# Altium PCB Axis_Channel_Blade.PcbDoc (part 2 of 2)
Units mm, origin at the board's own origin, x right, y up, seen from the top; angles counter-clockwise.
Board outline 100 x 100 mm, 4 copper layers (Top Layer 1, L2_GND, L3_PWR, Bottom Layer 1), stack 1.556 mm thick; 170 components, 613 nets, 644 pads, 0 vias.
Unrouted connection lines stored in the file: 341.
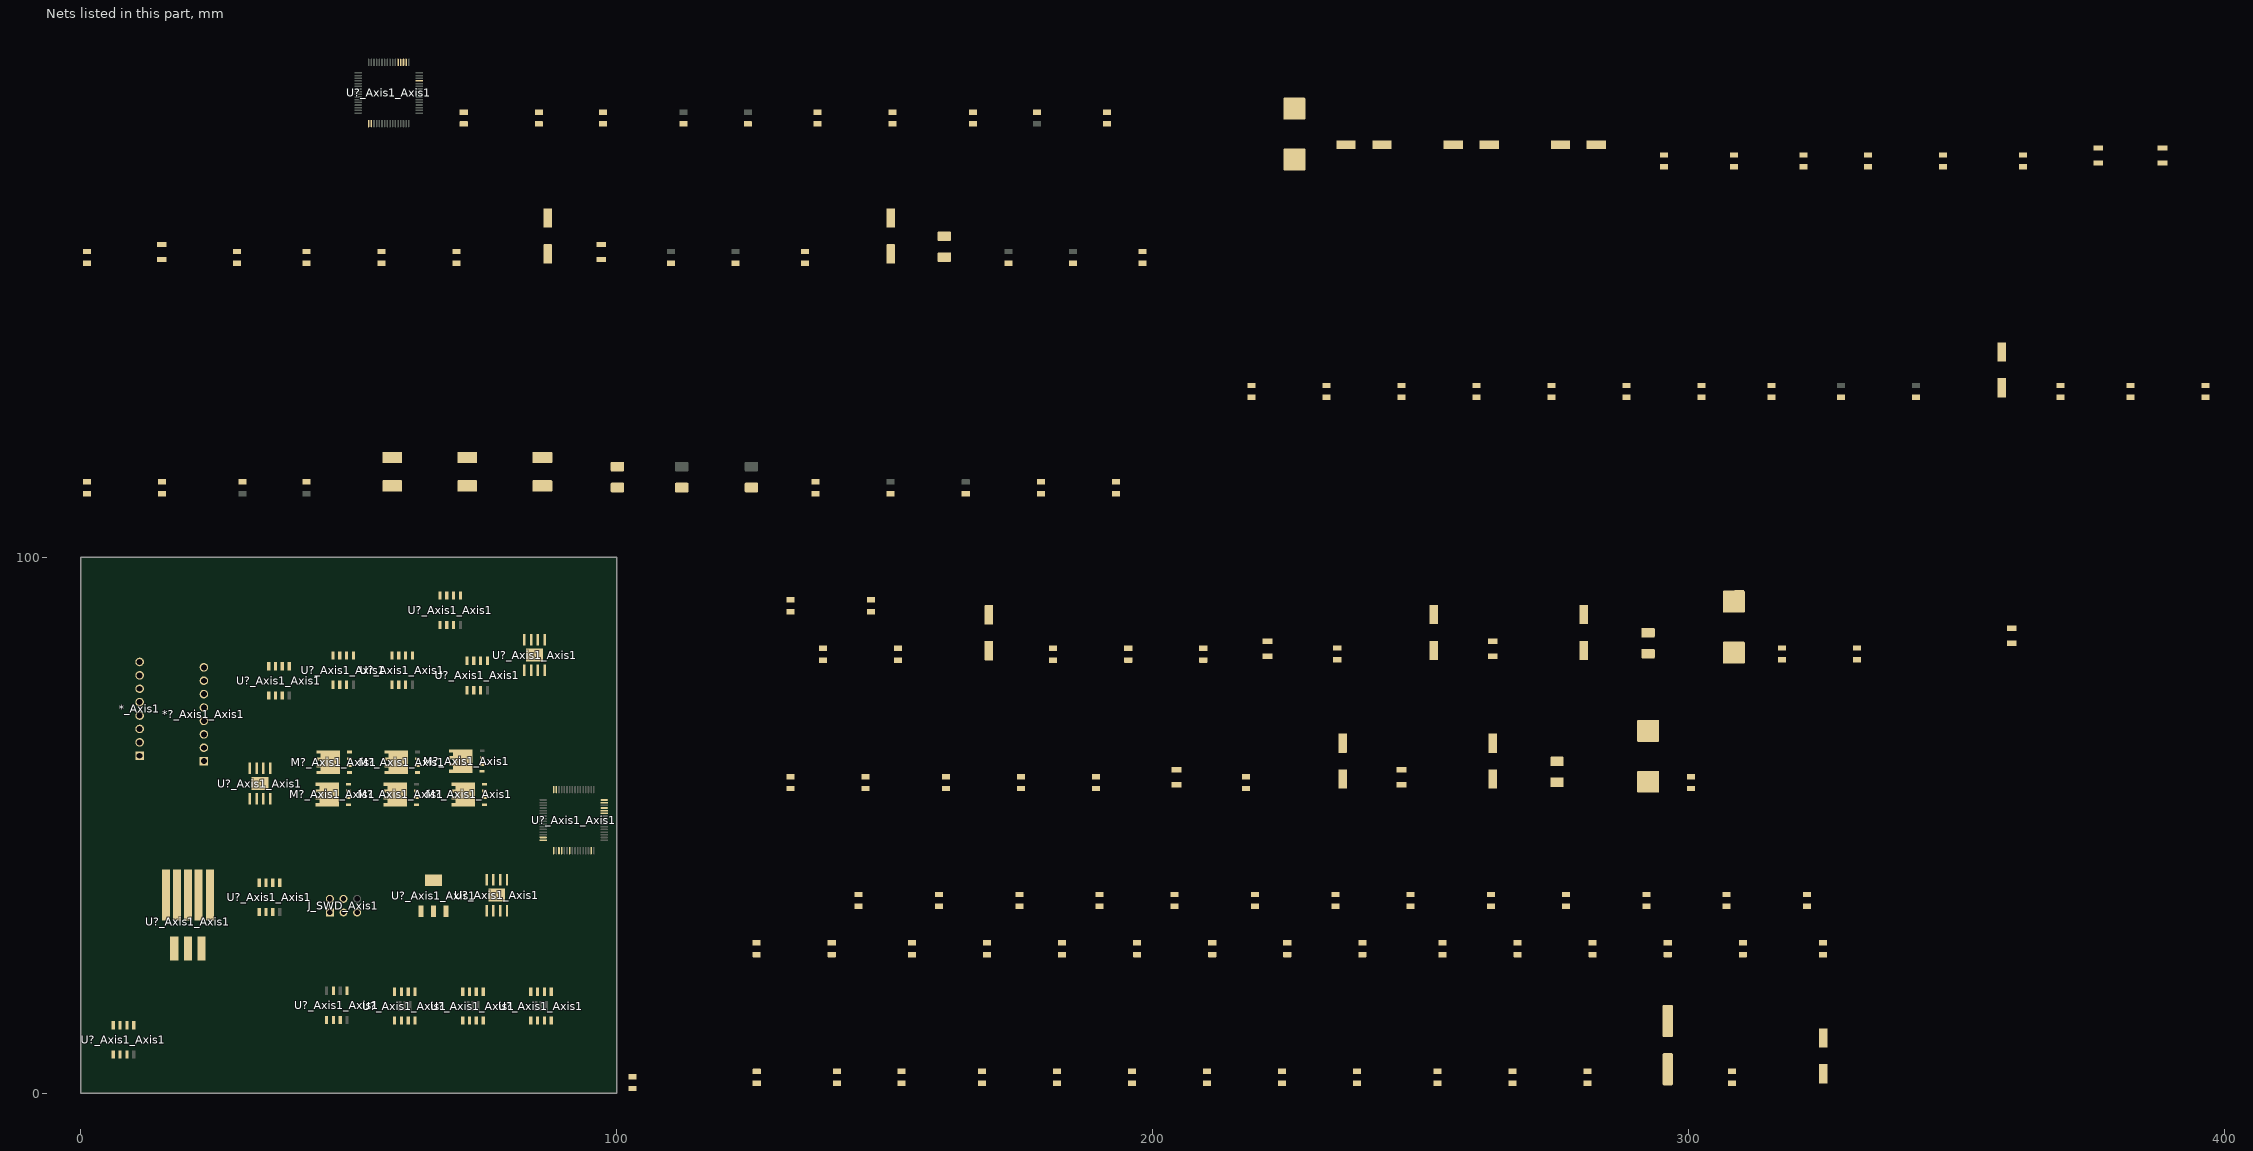
[diagram p4: the nets of this part, all layers, seen from the top]

## Part data
C1_Axis1 C2_Axis1 C3_Axis1 C9_Axis1 C14_Axis1 C33_Axis1 C35_Axis1 C49_Axis1 C49_Axis2 C51_Axis1: "2.2u-10u"
C4_Axis1 C5_Axis1 C6_Axis1 C10_Axis1 C11_Axis1 C12_Axis1 C13_Axis1 C15_Axis1 C16_Axis1 C17_Axis1 C19_Axis1 C20_Axis1 C23_Axis1 C25_Axis1 C26_Axis1 C28_Axis1 C29_Axis1 C34_Axis1 C36_Axis1 C37_Axis1 C39_Axis1 C41_Axis1 C45_Axis1 C46_Axis1 C50_Axis1 C52_Axis1 C53_Axis1 C55_Axis1 C55_Axis2 C56_Axis1 C56_Axis2 C57_Axis1 C57_Axis2 C58_Axis1 C58_Axis2 C59_Axis1 C59_Axis2 C60_Axis1 C60_Axis2 C61_Axis1 C61_Axis2 C?_Axis1: "0.1u-1u"
C7_Axis1 C8_Axis1 C18_Axis1 C31_Axis1 C32_Axis1 C38_Axis1 C47_Axis1 C48_Axis1 C54_Axis1 C_BULK1_Axis1 C_BULK2_Axis1 C_BULK3_Axis1: library part "ECAP SMD", "50V 220u ECAP"
C40_Axis1 C42_Axis1 C43_Axis1 C44_Axis1 C?_Axis1 C?_Axis1 C?_Axis1 C?_Axis1: library part "Capacitor 0805"
  C40_Axis1 C?_Axis1: Parameter 1=100n
  C43_Axis1 C?_Axis1: Parameter 1=10p
  C44_Axis1 C?_Axis1 C?_Axis1: Parameter 1=30p
D?_Axis1 D?_Axis1 D?_Axis1: library part "Suppressor Dual", "Suppressor Dual"
FB1_Axis1 FB2_Axis1 FB3_Axis1 FB4_Axis1 FB5_Axis1 FB?_Axis1: "600 ohm 100Mhz"
M?_Axis1_Axis1 M?_Axis1_Axis1 M?_Axis1_Axis1 M?_Axis1_Axis1 M?_Axis1_Axis1 M?_Axis1_Axis1: library part BSC030N08NS5
R?_Axis1 R?_Axis1 R?_Axis1 R?_Axis1: library part "Resistor 0805"
U?_Axis1_Axis1 U?_Axis1_Axis1: "STM32 with ADC"
U?_Axis1_Axis1 U?_Axis1_Axis1 U?_Axis1_Axis1 U?_Axis1_Axis1 U?_Axis1_Axis1 U?_Axis1_Axis1: "20 Mbps RS-422/485"
U?_Axis1_Axis1: "Output Current up to 1A"
U?_Axis1_Axis1 U?_Axis1_Axis1 U?_Axis1_Axis1: "Step down DC/DC"
U?_Axis1_Axis1 U?_Axis1_Axis1 U?_Axis1_Axis1: "3A, 20V Half-Bridge Gate Driver"
U?_Axis1_Axis1 U?_Axis1_Axis1: "Amplifier. A1=20 V/V and +-6.75 Mohm for shunt"
U?_Axis1_Axis1: "LDO 3.3V"
Y?_Axis1: library part Crystal

## Nets (pads, with @x,y where several pads share a name; then routed paths per layer and width w, separated by ;. In a path a pad name is that pad's centre, name@x,y a point inside that pad or via, vN(x,y) a via of type N, cw(c..) or ccw(c..) an arc to the next point about the centre after c; other vN are vias at no path point)
+3.3: C23_Axis1.2 C25_Axis1.2 C28_Axis1.2 C37_Axis1.2 FB4_Axis1.2 FB5_Axis1.2 FB?_Axis1.1 J_SWD_Axis1.1 R28_Axis1.2 U?_Axis1_Axis1.1@88.25,45.3 U?_Axis1_Axis1.2@65.839,33.959 U?_Axis1_Axis1.3@35.857,33.855 U?_Axis1_Axis1.3@48.433,13.683 U?_Axis1_Axis1.4@65.839,39.759 U?_Axis1_Axis1.32@97.7,54.75 U?_Axis1_Axis1.48@88.25,56.7 U?_Axis1_Axis1.64@86.3,47.25
+5: *?_Axis1_Axis1.2 C53_Axis1.2 U?_Axis1_Axis1.3@22.54,27 U?_Axis1_Axis1.8@6.075,12.725 U?_Axis1_Axis1.8@35.075,79.725 U?_Axis1_Axis1.8@47.075,81.725 U?_Axis1_Axis1.8@58.075,81.725 U?_Axis1_Axis1.8@67.041,92.89 U?_Axis1_Axis1.8@72.075,80.725
+12: FB1_Axis1.2 FB2_Axis1.2 FB3_Axis1.2
A1_Axis1: C56_Axis1.2 R42_Axis1.2
A1_Axis1_N: *_Axis1.4 U?_Axis1_Axis1.7@36.35,79.725
A1_Axis1_P: U?_Axis1_Axis1.6@37.625,79.725
A1_Axis2: C56_Axis2.2 R42_Axis2.2
A1_Axis2_N: 
A1_Axis2_P: 
A1_Axis3: 
A1_Axis3_N: 
A1_Axis3_P: 
A1_Axis4: 
A1_Axis4_N: 
A1_Axis4_P: 
A1_Axis5: 
A1_Axis5_N: 
A1_Axis5_P: 
A1_Axis6: 
A1_Axis6_N: 
A1_Axis6_P: 
A2_Axis1: C59_Axis1.2 R45_Axis1.2
A2_Axis1_N: *?_Axis1_Axis1.4 U?_Axis1_Axis1.7@73.35,80.725
A2_Axis1_P: *?_Axis1_Axis1.3 U?_Axis1_Axis1.6@74.625,80.725
A2_Axis2: C59_Axis2.2 R45_Axis2.2
A2_Axis2_N: 
A2_Axis2_P: 
A2_Axis3: 
A2_Axis3_N: 
A2_Axis3_P: 
A2_Axis4: 
A2_Axis4_N: 
A2_Axis4_P: 
A2_Axis5: 
A2_Axis5_N: 
A2_Axis5_P: 
A2_Axis6: 
A2_Axis6_N: 
A2_Axis6_P: 
AGND: C20_Axis1.2 C26_Axis1.2 C29_Axis1.2 C40_Axis1.2 C42_Axis1.2 C44_Axis1.1 C?_Axis1.1@166.481,180.9 C?_Axis1.1@300.481,56.9 C?_Axis1.2@30.156,114.1 C?_Axis1.2@178.481,183.1 U?_Axis1_Axis1.2@34.582,33.855 U?_Axis1_Axis1.2@47.158,13.683 U?_Axis1_Axis1.7@34.582,39.33 U?_Axis1_Axis1.7@47.158,19.158 U?_Axis1_Axis1.27@97.7,52.25
"AMP1 IN+_Axis1": M?_Axis1_Axis1.1@50.171,59.877 M?_Axis1_Axis1.2@50.173,61.147 M?_Axis1_Axis1.3@50.173,62.417 R12_Axis1.1 R19_Axis1.1 R22_Axis1.2 R?_Axis1.1@124.481,180.9
"AMP1 IN+_Axis2": 
"AMP1 IN+_Axis3": 
"AMP1 IN+_Axis4": 
"AMP1 IN+_Axis5": 
"AMP1 IN+_Axis6": 
"AMP1 IN-_Axis1": 
"AMP1 IN-_Axis1": C1_Axis1.2 C2_Axis1.2 C3_Axis1.2 C4_Axis1.2 C5_Axis1.2 C6_Axis1.2 C8_Axis1.1 C9_Axis1.1 C10_Axis1.1 C14_Axis1.1 C18_Axis1.2 C19_Axis1.2 C32_Axis1.1 C33_Axis1.1 C34_Axis1.1 C35_Axis1.1 C36_Axis1.1 C37_Axis1.1 C38_Axis1.2 C39_Axis1.2 C48_Axis1.1 C49_Axis1.1 C49_Axis2.1 C50_Axis1.1 C51_Axis1.1 C52_Axis1.1 C53_Axis1.1 C54_Axis1.2 C55_Axis1.2 C55_Axis2.2 C_BULK1_Axis1.2 C_BULK2_Axis1.2 C_BULK3_Axis1.2 D1_Axis1.1 D5_Axis1.1 D6_Axis1.1 D?_Axis1.1 R15_Axis1.1 R16_Axis1.1 R18_Axis1.1 R22_Axis1.1 R23_Axis1.1 R24_Axis1.1 R30_Axis1.1 R31_Axis1.1 R33_Axis1.1 R38_Axis1.1 R39_Axis1.1 R41_Axis1.1 R41_Axis2.1 R?_Axis1.1@85.481,180.9 R?_Axis1.1@331.475,80.9 U?_Axis1_Axis1.1@63.539,33.959 U?_Axis1_Axis1.2@20,27 U?_Axis1_Axis1.4@15.9,37 U?_Axis1_Axis1.4@18,37 U?_Axis1_Axis1.4@20,37 U?_Axis1_Axis1.4@22,37 U?_Axis1_Axis1.4@24.1,37 U?_Axis1_Axis1.7@32.819,60.689 U?_Axis1_Axis1.7@59.858,18.981 U?_Axis1_Axis1.7@72.558,18.981 U?_Axis1_Axis1.7@77.015,39.861 U?_Axis1_Axis1.7@84.049,84.673 U?_Axis1_Axis1.7@85.258,18.981 U?_Axis1_Axis1.9@33.454,57.814 U?_Axis1_Axis1.9@77.65,36.986 U?_Axis1_Axis1.9@84.684,81.798
"AMP1 IN-_Axis2": 
"AMP1 IN-_Axis3": 
"AMP1 IN-_Axis4": 
"AMP1 IN-_Axis5": 
"AMP1 IN-_Axis6": 
"AMP2 IN+_Axis1": M?_Axis1_Axis1.1@74.928,60.095 M?_Axis1_Axis1.2@74.93,61.365 M?_Axis1_Axis1.3@74.93,62.635 R14_Axis1.1 R21_Axis1.1 R24_Axis1.2 R?_Axis1.1@141.156,1.9
"AMP2 IN+_Axis2": 
"AMP2 IN+_Axis3": 
"AMP2 IN+_Axis4": 
"AMP2 IN+_Axis5": 
"AMP2 IN+_Axis6": 
B1_Axis1: C57_Axis1.2 R43_Axis1.2
B1_Axis1_N: *_Axis1.6 U?_Axis1_Axis1.7@48.35,81.725
B1_Axis1_P: *_Axis1.5 U?_Axis1_Axis1.6@49.625,81.725
B1_Axis2: C57_Axis2.2 R43_Axis2.2
B1_Axis2_N: 
B1_Axis2_P: 
B1_Axis3: 
B1_Axis3_N: 
B1_Axis3_P: 
B1_Axis4: 
B1_Axis4_N: 
B1_Axis4_P: 
B1_Axis5: 
B1_Axis5_N: 
B1_Axis5_P: 
B1_Axis6: 
B1_Axis6_N: 
B1_Axis6_P: 
B2_Axis1: C60_Axis1.2 R46_Axis1.2
B2_Axis1_N: *?_Axis1_Axis1.6 U?_Axis1_Axis1.7@68.316,92.89
B2_Axis1_P: *?_Axis1_Axis1.5 U?_Axis1_Axis1.6@69.591,92.89
B2_Axis2: C60_Axis2.2 R46_Axis2.2
B2_Axis2_N: 
B2_Axis2_P: 
B2_Axis3: 
B2_Axis3_N: 
B2_Axis3_P: 
B2_Axis4: 
B2_Axis4_N: 
B2_Axis4_P: 
B2_Axis5: 
B2_Axis5_N: 
B2_Axis5_P: 
B2_Axis6: 
B2_Axis6_N: 
B2_Axis6_P: 
CS_Axis1: U?_Axis1_Axis1.18@60.73,192.375
CS_Axis2: 
CS_Axis3: 
CS_Axis4: 
CS_Axis5: 
CS_Axis6: 
DGND: *?_Axis1_Axis1.1 C23_Axis1.1 C25_Axis1.1 C28_Axis1.1 C41_Axis1.1 C45_Axis1.1 C46_Axis1.1 C56_Axis1.1 C56_Axis2.1 C57_Axis1.1 C57_Axis2.1 C58_Axis1.1 C58_Axis2.1 C59_Axis1.1 C59_Axis2.1 C60_Axis1.1 C60_Axis2.1 C61_Axis1.1 C61_Axis2.1 J_SWD_Axis1.3 U?_Axis1_Axis1.2@7.35,7.25 U?_Axis1_Axis1.2@36.35,74.25 U?_Axis1_Axis1.2@48.35,76.25 U?_Axis1_Axis1.2@59.35,76.25 U?_Axis1_Axis1.2@68.316,87.415 U?_Axis1_Axis1.2@73.35,75.25 U?_Axis1_Axis1.3@8.625,7.25 U?_Axis1_Axis1.3@37.625,74.25 U?_Axis1_Axis1.3@49.625,76.25 U?_Axis1_Axis1.3@60.625,76.25 U?_Axis1_Axis1.3@69.591,87.415 U?_Axis1_Axis1.3@74.625,75.25 U?_Axis1_Axis1.5@9.9,12.725 U?_Axis1_Axis1.5@38.9,79.725 U?_Axis1_Axis1.5@50.9,81.725 U?_Axis1_Axis1.5@61.9,81.725 U?_Axis1_Axis1.5@70.866,92.89 U?_Axis1_Axis1.5@75.9,80.725 U?_Axis1_Axis1.15@95.25,45.3 U?_Axis1_Axis1.31@97.7,54.25 U?_Axis1_Axis1.47@88.75,56.7 U?_Axis1_Axis1.63@86.3,47.75
GND: 
"MAIN VCC": C8_Axis1.2 C9_Axis1.2 C32_Axis1.2 C33_Axis1.2 C48_Axis1.2 C49_Axis1.2 C49_Axis2.2 C_BULK1_Axis1.1 C_BULK2_Axis1.1 C_BULK3_Axis1.1 M?_Axis1_Axis1.5@44.183,53.877 M?_Axis1_Axis1.5@46.348,55.782 M?_Axis1_Axis1.5@56.883,53.877 M?_Axis1_Axis1.5@59.048,55.782 M?_Axis1_Axis1.5@69.583,53.877 M?_Axis1_Axis1.5@71.748,55.782 M?_Axis1_Axis1.6@44.183,55.147 M?_Axis1_Axis1.6@56.883,55.147 M?_Axis1_Axis1.6@69.583,55.147 M?_Axis1_Axis1.7@44.183,56.417 M?_Axis1_Axis1.7@56.883,56.417 M?_Axis1_Axis1.7@69.583,56.417 M?_Axis1_Axis1.8@44.183,57.687 M?_Axis1_Axis1.8@56.883,57.687 M?_Axis1_Axis1.8@69.583,57.687 R7_Axis1.2 R27_Axis1.2 R36_Axis1.2 U?_Axis1_Axis1.2@32.819,54.939 U?_Axis1_Axis1.2@77.015,34.111 U?_Axis1_Axis1.2@84.049,78.923
MISO_Axis1: U?_Axis1_Axis1.20@59.73,192.375
MISO_Axis2: 
MISO_Axis3: 
MISO_Axis4: 
MISO_Axis5: 
MISO_Axis6: 
MOSI_Axis1: U?_Axis1_Axis1.21@59.23,192.375
MOSI_Axis2: 
MOSI_Axis3: 
MOSI_Axis4: 
MOSI_Axis5: 
MOSI_Axis6: 
NetC1_Axis1_1: C1_Axis1.1 C4_Axis1.1 FB1_Axis1.1 U?_Axis1_Axis1.1@58.583,13.606
NetC1_Axis2_1: 
NetC1_Axis3_1: 
NetC1_Axis4_1: 
NetC1_Axis5_1: 
NetC1_Axis6_1: 
NetC2_Axis1_1: C2_Axis1.1 C5_Axis1.1 FB2_Axis1.1 U?_Axis1_Axis1.1@71.283,13.606
NetC2_Axis2_1: 
NetC2_Axis3_1: 
NetC2_Axis4_1: 
NetC2_Axis5_1: 
NetC2_Axis6_1: 
NetC3_Axis1_1: C3_Axis1.1 C6_Axis1.1 FB3_Axis1.1 U?_Axis1_Axis1.1@83.983,13.606
NetC3_Axis2_1: 
NetC3_Axis3_1: 
NetC3_Axis4_1: 
NetC3_Axis5_1: 
NetC3_Axis6_1: 
NetC7_Axis1_1: C7_Axis1.1 L?_Axis1.1@226.475,174.25 U?_Axis1_Axis1.8@31.549,60.689
NetC7_Axis1_2: C7_Axis1.2 U?_Axis1_Axis1.1@31.549,54.939
NetC7_Axis2_1: 
NetC7_Axis2_2: 
NetC7_Axis3_1: 
NetC7_Axis3_2: 
NetC7_Axis4_1: 
NetC7_Axis4_2: 
NetC7_Axis5_1: 
NetC7_Axis5_2: 
NetC7_Axis6_1: 
NetC7_Axis6_2: 
NetC10_Axis1_2: C10_Axis1.2 C14_Axis1.2 D1_Axis1.2 L?_Axis1.2@226.475,183.75 R8_Axis1.1
NetC10_Axis2_2: 
NetC10_Axis3_2: 
NetC10_Axis4_2: 
NetC10_Axis5_2: 
NetC10_Axis6_2: 
NetC11_Axis1_2: C11_Axis1.2 U?_Axis1_Axis1.2@59.858,13.606
NetC11_Axis2_2: 
NetC11_Axis3_2: 
NetC11_Axis4_2: 
NetC11_Axis5_2: 
NetC11_Axis6_2: 
NetC12_Axis1_2: C12_Axis1.2 U?_Axis1_Axis1.2@72.558,13.606
NetC12_Axis2_2: 
NetC12_Axis3_2: 
NetC12_Axis4_2: 
NetC12_Axis5_2: 
NetC12_Axis6_2: 
NetC13_Axis1_2: C13_Axis1.2 U?_Axis1_Axis1.2@85.258,13.606
NetC13_Axis2_2: 
NetC13_Axis3_2: 
NetC13_Axis4_2: 
NetC13_Axis5_2: 
NetC13_Axis6_2: 
NetC15_Axis1_2: C15_Axis1.2 R12_Axis1.2
NetC15_Axis2_2: 
NetC15_Axis3_2: 
NetC15_Axis4_2: 
NetC15_Axis5_2: 
NetC15_Axis6_2: 
NetC16_Axis1_2: C16_Axis1.2 R13_Axis1.2
NetC16_Axis2_2: 
NetC16_Axis3_2: 
NetC16_Axis4_2: 
NetC16_Axis5_2: 
NetC16_Axis6_2: 
NetC17_Axis1_2: C17_Axis1.2 R14_Axis1.2
NetC17_Axis2_2: 
NetC17_Axis3_2: 
NetC17_Axis4_2: 
NetC17_Axis5_2: 
NetC17_Axis6_2: 
NetC18_Axis1_1: C18_Axis1.1 R17_Axis1.1 U?_Axis1_Axis1.5@35.359,60.689
NetC18_Axis2_1: 
NetC18_Axis3_1: 
NetC18_Axis4_1: 
NetC18_Axis5_1: 
NetC18_Axis6_1: 
NetC19_Axis1_1: C19_Axis1.1 R17_Axis1.2
NetC19_Axis2_1: 
NetC19_Axis3_1: 
NetC19_Axis4_1: 
NetC19_Axis5_1: 
NetC19_Axis6_1: 
NetC20_Axis1_1: C20_Axis1.1 C26_Axis1.1 C29_Axis1.1 C?_Axis1.2@166.481,183.1 FB?_Axis1.2 U?_Axis1_Axis1.28@97.7,52.75 U?_Axis1_Axis1.29@97.7,53.25
NetC20_Axis2_1: 
NetC20_Axis3_1: 
NetC20_Axis4_1: 
NetC20_Axis5_1: 
NetC20_Axis6_1: 
NetC31_Axis1_1: C31_Axis1.1 L?_Axis1.1@292.48,58.152 U?_Axis1_Axis1.8@75.745,39.861
NetC31_Axis1_2: C31_Axis1.2 U?_Axis1_Axis1.1@75.745,34.111
NetC31_Axis2_1: 
NetC31_Axis2_2: 
NetC31_Axis3_1: 
NetC31_Axis3_2: 
NetC31_Axis4_1: 
NetC31_Axis4_2: 
NetC31_Axis5_1: 
NetC31_Axis5_2: 
NetC31_Axis6_1: 
NetC31_Axis6_2: 
NetC34_Axis1_2: C34_Axis1.2 C35_Axis1.2 C36_Axis1.2 D5_Axis1.2 L?_Axis1.2@292.48,67.652 R29_Axis1.1 U?_Axis1_Axis1.3@68.139,33.959
NetC34_Axis2_2: 
NetC34_Axis3_2: 
NetC34_Axis4_2: 
NetC34_Axis5_2: 
NetC34_Axis6_2: 
NetC38_Axis1_1: C38_Axis1.1 R32_Axis1.1 U?_Axis1_Axis1.5@79.555,39.861
NetC38_Axis2_1: 
NetC38_Axis3_1: 
NetC38_Axis4_1: 
NetC38_Axis5_1: 
NetC38_Axis6_1: 
NetC39_Axis1_1: C39_Axis1.1 R32_Axis1.2
NetC39_Axis2_1: 
NetC39_Axis3_1: 
NetC39_Axis4_1: 
NetC39_Axis5_1: 
NetC39_Axis6_1: 
NetC40_Axis1_1: C40_Axis1.1 FB5_Axis1.1 U?_Axis1_Axis1.6@35.857,39.33
NetC40_Axis2_1: 
NetC40_Axis3_1: 
NetC40_Axis4_1: 
NetC40_Axis5_1: 
NetC40_Axis6_1: 
NetC41_Axis1_2: C41_Axis1.2 J_SWD_Axis1.5 R28_Axis1.1 U?_Axis1_Axis1.7@91.25,45.3
NetC41_Axis2_2: 
NetC41_Axis3_2: 
NetC41_Axis4_2: 
NetC41_Axis5_2: 
NetC41_Axis6_2: 
NetC42_Axis1_1: C42_Axis1.1 C43_Axis1.2 R?_Axis1.2@141.156,4.1 U?_Axis1_Axis1.8@33.307,39.33
NetC42_Axis2_1: 
NetC42_Axis3_1: 
NetC42_Axis4_1: 
NetC42_Axis5_1: 
NetC42_Axis6_1: 
NetC43_Axis1_1: C43_Axis1.1 C44_Axis1.2 R?_Axis1.2@331.475,83.1 U?_Axis1_Axis1.1@33.307,33.855
NetC43_Axis2_1: 
NetC43_Axis3_1: 
NetC43_Axis4_1: 
NetC43_Axis5_1: 
NetC43_Axis6_1: 
NetC45_Axis1_2: C45_Axis1.2 U?_Axis1_Axis1.4@89.75,45.3 Y?_Axis1.1
NetC45_Axis2_2: 
NetC45_Axis3_2: 
NetC45_Axis4_2: 
NetC45_Axis5_2: 
NetC45_Axis6_2: 
NetC46_Axis1_2: C46_Axis1.2 U?_Axis1_Axis1.3@89.25,45.3 Y?_Axis1.2
NetC46_Axis2_2: 
NetC46_Axis3_2: 
NetC46_Axis4_2: 
NetC46_Axis5_2: 
NetC46_Axis6_2: 
NetC47_Axis1_1: C47_Axis1.1 L?_Axis1.1@308.475,82.25 U?_Axis1_Axis1.8@82.779,84.673
NetC47_Axis1_2: C47_Axis1.2 U?_Axis1_Axis1.1@82.779,78.923
NetC47_Axis2_1: 
NetC47_Axis2_2: 
NetC47_Axis3_1: 
NetC47_Axis3_2: 
NetC47_Axis4_1: 
NetC47_Axis4_2: 
NetC47_Axis5_1: 
NetC47_Axis5_2: 
NetC47_Axis6_1: 
NetC47_Axis6_2: 
NetC50_Axis1_2: C50_Axis1.2 C51_Axis1.2 C52_Axis1.2 D6_Axis1.2 L?_Axis1.2@308.475,91.75 R37_Axis1.1 U?_Axis1_Axis1.1@17.46,27
NetC50_Axis2_2: 
NetC50_Axis3_2: 
NetC50_Axis4_2: 
NetC50_Axis5_2: 
NetC50_Axis6_2: 
NetC54_Axis1_1: C54_Axis1.1 R40_Axis1.1 U?_Axis1_Axis1.5@86.589,84.673
NetC54_Axis2_1: R40_Axis2.1
NetC54_Axis3_1: 
NetC54_Axis4_1: 
NetC54_Axis5_1: 
NetC54_Axis6_1: 
NetC55_Axis1_1: C55_Axis1.1 R40_Axis1.2
NetC55_Axis2_1: C55_Axis2.1 R40_Axis2.2
NetC55_Axis3_1: 
NetC55_Axis4_1: 
NetC55_Axis5_1: 
NetC55_Axis6_1: 
NetC?_Axis1_1: C?_Axis1.1@112.481,180.9 C?_Axis1.2@300.481,59.1 R?_Axis1.2@85.481,183.1 U?_Axis1_Axis1.1@45.883,13.683
NetC?_Axis1_2: 
NetC?_Axis2_1: 
NetC?_Axis2_2: 
NetC?_Axis3_1: 
NetC?_Axis3_2: 
NetC?_Axis4_1: 
NetC?_Axis4_2: 
NetC?_Axis5_1: 
NetC?_Axis5_2: 
NetC?_Axis6_1: 
NetC?_Axis6_2: 
NetD?_Axis1_1: 
NetD?_Axis1_2: D?_Axis1.2@100.156,116.95 M?_Axis1_Axis1.4@50.173,63.687 R9_Axis1.2 R19_Axis1.2
NetD?_Axis2_1: 
NetD?_Axis2_2: 
NetD?_Axis3_1: 
NetD?_Axis3_2: 
NetD?_Axis4_1: 
NetD?_Axis4_2: 
NetD?_Axis5_1: 
NetD?_Axis5_2: 
NetD?_Axis6_1: 
NetD?_Axis6_2: 
NetM?_Axis1_4: M?_Axis1_Axis1.4@49.973,57.687
NetM?_Axis1_Axis1_1: M?_Axis1_Axis1.1@62.871,59.877 M?_Axis1_Axis1.2@62.873,61.147 M?_Axis1_Axis1.3@62.873,62.417 R13_Axis1.1 R20_Axis1.1 R23_Axis1.2
NetM?_Axis1_Axis1_4: M?_Axis1_Axis1.4@75.373,57.687 R3_Axis1.2 R6_Axis1.2
NetM?_Axis1_Axis2_1: 
NetM?_Axis1_Axis2_4: 
NetM?_Axis1_Axis3_1: 
NetM?_Axis1_Axis3_4: 
NetM?_Axis1_Axis4_1: 
NetM?_Axis1_Axis4_4: 
NetM?_Axis1_Axis5_1: 
NetM?_Axis1_Axis5_4: 
NetM?_Axis1_Axis6_1: 
NetM?_Axis1_Axis6_4: 
NetM?_Axis2_1: 
NetM?_Axis2_4: 
NetM?_Axis3_1: 
NetM?_Axis3_4: 
NetM?_Axis4_1: 
NetM?_Axis4_4: 
NetM?_Axis5_1: 
NetM?_Axis5_4: 
NetM?_Axis6_1: 
NetM?_Axis6_4: 
NetR1_Axis1_1: R1_Axis1.1 U?_Axis1_Axis1.3@61.133,13.606
NetR1_Axis2_1: 
NetR1_Axis3_1: 
NetR1_Axis4_1: 
NetR1_Axis5_1: 
NetR1_Axis6_1: 
NetR2_Axis1_1: R2_Axis1.1 U?_Axis1_Axis1.3@73.833,13.606
NetR2_Axis2_1: 
NetR2_Axis3_1: 
NetR2_Axis4_1: 
NetR2_Axis5_1: 
NetR2_Axis6_1: 
NetR3_Axis1_1: R3_Axis1.1 U?_Axis1_Axis1.3@86.533,13.606
NetR3_Axis2_1: 
NetR3_Axis3_1: 
NetR3_Axis4_1: 
NetR3_Axis5_1: 
NetR3_Axis6_1: 
NetR7_Axis1_1: R7_Axis1.1 R15_Axis1.2 U?_Axis1_Axis1.3@34.089,54.939
NetR7_Axis2_1: 
NetR7_Axis3_1: 
NetR7_Axis4_1: 
NetR7_Axis5_1: 
NetR7_Axis6_1: 
NetR8_Axis1_2: R8_Axis1.2 R18_Axis1.2 U?_Axis1_Axis1.6@34.089,60.689
NetR8_Axis2_2: 
NetR8_Axis3_2: 
NetR8_Axis4_2: 
NetR8_Axis5_2: 
NetR8_Axis6_2: 
NetR9_Axis1_1: R9_Axis1.1 U?_Axis1_Axis1.8@58.583,18.981
NetR9_Axis2_1: 
NetR9_Axis3_1: 
NetR9_Axis4_1: 
NetR9_Axis5_1: 
NetR9_Axis6_1: 
NetR10_Axis1_1: R10_Axis1.1 U?_Axis1_Axis1.8@71.283,18.981
NetR10_Axis2_1: 
NetR10_Axis3_1: 
NetR10_Axis4_1: 
NetR10_Axis5_1: 
NetR10_Axis6_1: 
NetR11_Axis1_1: R11_Axis1.1 U?_Axis1_Axis1.8@83.983,18.981
NetR11_Axis2_1: 
NetR11_Axis3_1: 
NetR11_Axis4_1: 
NetR11_Axis5_1: 
NetR11_Axis6_1: 
NetR16_Axis1_2: R16_Axis1.2 U?_Axis1_Axis1.4@35.359,54.939
NetR16_Axis2_2: 
NetR16_Axis3_2: 
NetR16_Axis4_2: 
NetR16_Axis5_2: 
NetR16_Axis6_2: 
NetR27_Axis1_1: R27_Axis1.1 R30_Axis1.2 U?_Axis1_Axis1.3@78.285,34.111
NetR27_Axis2_1: 
NetR27_Axis3_1: 
NetR27_Axis4_1: 
NetR27_Axis5_1: 
NetR27_Axis6_1: 
NetR29_Axis1_2: R29_Axis1.2 R33_Axis1.2 U?_Axis1_Axis1.6@78.285,39.861
NetR29_Axis2_2: 
NetR29_Axis3_2: 
NetR29_Axis4_2: 
NetR29_Axis5_2: 
NetR29_Axis6_2: 
NetR31_Axis1_2: R31_Axis1.2 U?_Axis1_Axis1.4@79.555,34.111
NetR31_Axis2_2: 
NetR31_Axis3_2: 
NetR31_Axis4_2: 
NetR31_Axis5_2: 
NetR31_Axis6_2: 
NetR36_Axis1_1: R36_Axis1.1 R38_Axis1.2 U?_Axis1_Axis1.3@85.319,78.923
NetR36_Axis2_1: 
NetR36_Axis3_1: 
NetR36_Axis4_1: 
NetR36_Axis5_1: 
NetR36_Axis6_1: 
NetR37_Axis1_2: R37_Axis1.2 R41_Axis1.2 U?_Axis1_Axis1.6@85.319,84.673
NetR37_Axis2_2: R41_Axis2.2
NetR37_Axis3_2: 
NetR37_Axis4_2: 
NetR37_Axis5_2: 
NetR37_Axis6_2: 
NetR39_Axis1_2: R39_Axis1.2 U?_Axis1_Axis1.4@86.589,78.923
NetR39_Axis2_2: 
NetR39_Axis3_2: 
NetR39_Axis4_2: 
NetR39_Axis5_2: 
NetR39_Axis6_2: 
NetR42_Axis1_1: R42_Axis1.1 U?_Axis1_Axis1.1@35.075,74.25
NetR42_Axis2_1: R42_Axis2.1
NetR42_Axis3_1: 
NetR42_Axis4_1: 
NetR42_Axis5_1: 
NetR42_Axis6_1: 
NetR43_Axis1_1: R43_Axis1.1 U?_Axis1_Axis1.1@47.075,76.25
NetR43_Axis2_1: R43_Axis2.1
NetR43_Axis3_1: 
NetR43_Axis4_1: 
NetR43_Axis5_1: 
NetR43_Axis6_1: 
NetR44_Axis1_1: R44_Axis1.1 U?_Axis1_Axis1.1@58.075,76.25
NetR44_Axis2_1: R44_Axis2.1
NetR44_Axis3_1: 
NetR44_Axis4_1: 
NetR44_Axis5_1: 
NetR44_Axis6_1: 
NetR45_Axis1_1: R45_Axis1.1 U?_Axis1_Axis1.1@72.075,75.25
NetR45_Axis2_1: R45_Axis2.1
NetR45_Axis3_1: 
NetR45_Axis4_1: 
NetR45_Axis5_1: 
NetR45_Axis6_1: 
NetR46_Axis1_1: R46_Axis1.1 U?_Axis1_Axis1.1@67.041,87.415
NetR46_Axis2_1: R46_Axis2.1
NetR46_Axis3_1: 
NetR46_Axis4_1: 
NetR46_Axis5_1: 
NetR46_Axis6_1: 
NetR47_Axis1_1: R47_Axis1.1 U?_Axis1_Axis1.1@6.075,7.25
NetR47_Axis2_1: R47_Axis2.1
NetR47_Axis3_1: 
NetR47_Axis4_1: 
NetR47_Axis5_1: 
NetR47_Axis6_1: 
NetR?_Axis1_1: 
NetR?_Axis1_2: 
NetR?_Axis2_1: 
NetR?_Axis2_2: 
NetR?_Axis3_1: 
NetR?_Axis3_2: 
NetR?_Axis4_1: 
NetR?_Axis4_2: 
NetR?_Axis5_1: 
NetR?_Axis5_2: 
NetR?_Axis6_1: 
NetR?_Axis6_2: 
NetU?_Axis1_2: 
NetU?_Axis1_5: U?_Axis1_Axis1.5@49.708,19.158
NetU?_Axis1_Axis1_5: U?_Axis1_Axis1.5@37.132,39.33 U?_Axis1_Axis1.13@63.18,188.925
NetU?_Axis1_Axis2_5: 
NetU?_Axis1_Axis3_5: 
NetU?_Axis1_Axis4_5: 
NetU?_Axis1_Axis5_5: 
NetU?_Axis1_Axis6_5: 
NetU?_Axis2_2: 
NetU?_Axis2_5: 
NetU?_Axis3_2: 
NetU?_Axis3_5: 
NetU?_Axis4_2: 
NetU?_Axis4_5: 
NetU?_Axis5_2: 
NetU?_Axis5_5: 
NetU?_Axis6_2: 
NetU?_Axis6_5: 
"PWM AH_Axis1": U?_Axis1_Axis1.5@62.408,18.981
"PWM AH_Axis2": 
"PWM AH_Axis3": 
"PWM AH_Axis4": 
"PWM AH_Axis5": 
"PWM AH_Axis6": 
"PWM AL_Axis1": U?_Axis1_Axis1.6@61.133,18.981
"PWM AL_Axis2": 
"PWM AL_Axis3": 
"PWM AL_Axis4": 
"PWM AL_Axis5": 
"PWM AL_Axis6": 
"PWM BH_Axis1": U?_Axis1_Axis1.5@75.108,18.981
"PWM BH_Axis2": 
"PWM BH_Axis3": 
"PWM BH_Axis4": 
"PWM BH_Axis5": 
"PWM BH_Axis6": 
"PWM BL_Axis1": U?_Axis1_Axis1.6@73.833,18.981
"PWM BL_Axis2": 
"PWM BL_Axis3": 
"PWM BL_Axis4": 
"PWM BL_Axis5": 
"PWM BL_Axis6": 
"PWM CH_Axis1": U?_Axis1_Axis1.5@87.808,18.981
"PWM CH_Axis2": 
"PWM CH_Axis3": 
"PWM CH_Axis4": 
"PWM CH_Axis5": 
"PWM CH_Axis6": 
"PWM CL_Axis1": U?_Axis1_Axis1.6@86.533,18.981
"PWM CL_Axis2": 
"PWM CL_Axis3": 
"PWM CL_Axis4": 
"PWM CL_Axis5": 
"PWM CL_Axis6": 
SCK_Axis1: U?_Axis1_Axis1.19@60.23,192.375
SCK_Axis2: 
SCK_Axis3: 
SCK_Axis4: 
SCK_Axis5: 
SCK_Axis6: 
SWCLK_Axis1: J_SWD_Axis1.4 U?_Axis1_Axis1.50@54.23,180.975
SWCLK_Axis2: 
SWCLK_Axis3: 
SWCLK_Axis4: 
SWCLK_Axis5: 
SWCLK_Axis6: 
SWDIO_Axis1: J_SWD_Axis1.2 U?_Axis1_Axis1.49@53.73,180.975
SWDIO_Axis2: 
SWDIO_Axis3: 
SWDIO_Axis4: 
SWDIO_Axis5: 
SWDIO_Axis6: 
Va_Axis1: *_Axis1.1 C11_Axis1.1 C15_Axis1.1 M?_Axis1_Axis1.1@49.971,53.877 M?_Axis1_Axis1.2@49.973,55.147 M?_Axis1_Axis1.3@49.973,56.417 M?_Axis1_Axis1.5@44.383,59.877 M?_Axis1_Axis1.5@46.548,61.782 M?_Axis1_Axis1.6@44.383,61.147 M?_Axis1_Axis1.7@44.383,62.417 M?_Axis1_Axis1.8@44.383,63.687 R4_Axis1.1 U?_Axis1_Axis1.4@62.408,13.606
Va_Axis2: 
Va_Axis3: 
Va_Axis4: 
Va_Axis5: 
Va_Axis6: 
Vb_Axis1: *_Axis1.2 C12_Axis1.1 C16_Axis1.1 M?_Axis1_Axis1.1@62.671,53.877 M?_Axis1_Axis1.2@62.673,55.147 M?_Axis1_Axis1.3@62.673,56.417 M?_Axis1_Axis1.5@57.083,59.877 M?_Axis1_Axis1.5@59.248,61.782 M?_Axis1_Axis1.6@57.083,61.147 M?_Axis1_Axis1.7@57.083,62.417 M?_Axis1_Axis1.8@57.083,63.687 R5_Axis1.1 U?_Axis1_Axis1.4@75.108,13.606
Vb_Axis2: 
Vb_Axis3: 
Vb_Axis4: 
Vb_Axis5: 
Vb_Axis6: 
Vc_Axis1: *_Axis1.3 C13_Axis1.1 C17_Axis1.1 M?_Axis1_Axis1.1@75.371,53.877 M?_Axis1_Axis1.2@75.373,55.147 M?_Axis1_Axis1.3@75.373,56.417 M?_Axis1_Axis1.5@69.14,60.095 M?_Axis1_Axis1.5@71.305,62 M?_Axis1_Axis1.6@69.14,61.365 M?_Axis1_Axis1.7@69.14,62.635 M?_Axis1_Axis1.8@69.14,63.905 R6_Axis1.1 U?_Axis1_Axis1.4@87.808,13.606
Vc_Axis2: 
Vc_Axis3: 
Vc_Axis4: 
Vc_Axis5: 
Vc_Axis6: 
Z1_Axis1: C58_Axis1.2 R44_Axis1.2
Z1_Axis1_N: *_Axis1.8 U?_Axis1_Axis1.7@59.35,81.725
Z1_Axis1_P: *_Axis1.7 U?_Axis1_Axis1.6@60.625,81.725
Z1_Axis2: C58_Axis2.2 R44_Axis2.2
Z1_Axis2_N: 
Z1_Axis2_P: 
Z1_Axis3: 
Z1_Axis3_N: 
Z1_Axis3_P: 
Z1_Axis4: 
Z1_Axis4_N: 
Z1_Axis4_P: 
Z1_Axis5: 
Z1_Axis5_N: 
Z1_Axis5_P: 
Z1_Axis6: 
Z1_Axis6_N: 
Z1_Axis6_P: 
Z2_Axis1: C61_Axis1.2 R47_Axis1.2
Z2_Axis1_N: *?_Axis1_Axis1.8 U?_Axis1_Axis1.7@7.35,12.725
Z2_Axis1_P: *?_Axis1_Axis1.7 U?_Axis1_Axis1.6@8.625,12.725
Z2_Axis2: C61_Axis2.2 R47_Axis2.2
Z2_Axis2_N: 
Z2_Axis2_P: 
Z2_Axis3: 
Z2_Axis3_N: 
Z2_Axis3_P: 
Z2_Axis4: 
Z2_Axis4_N: 
Z2_Axis4_P: 
Z2_Axis5: 
Z2_Axis5_N: 
Z2_Axis5_P: 
Z2_Axis6: 
Z2_Axis6_N: 
Z2_Axis6_P: 
pads on no net: C?_Axis1.1@30.156,111.9 C?_Axis1.1@178.481,180.9 C?_Axis1.2@112.481,183.1 D?_Axis1.2@112.156,116.95 D?_Axis1.2@125.156,116.95 FB4_Axis1.1 J_SWD_Axis1.6 M?_Axis1_Axis1.4@62.673,57.687 M?_Axis1_Axis1.4@62.873,63.687 M?_Axis1_Axis1.4@74.93,63.905 R1_Axis1.2 R2_Axis1.2 R4_Axis1.2 R5_Axis1.2 R10_Axis1.2 R11_Axis1.2 R20_Axis1.2 R21_Axis1.2 R?_Axis1.2@124.481,183.1 U?_Axis1_Axis1.1@63.18,182.925 U?_Axis1_Axis1.2@63.18,183.425 U?_Axis1_Axis1.2@88.75,45.3 U?_Axis1_Axis1.3@63.18,183.925 U?_Axis1_Axis1.4@9.9,7.25 U?_Axis1_Axis1.4@37.132,33.855 U?_Axis1_Axis1.4@38.9,74.25 U?_Axis1_Axis1.4@49.708,13.683 U?_Axis1_Axis1.4@50.9,76.25 U?_Axis1_Axis1.4@61.9,76.25 U?_Axis1_Axis1.4@63.18,184.425 U?_Axis1_Axis1.4@70.866,87.415 U?_Axis1_Axis1.4@75.9,75.25 U?_Axis1_Axis1.5@63.18,184.925 U?_Axis1_Axis1.5@90.25,45.3 U?_Axis1_Axis1.6@48.433,19.158 U?_Axis1_Axis1.6@63.18,185.425 U?_Axis1_Axis1.6@90.75,45.3 U?_Axis1_Axis1.7@63.18,185.925 U?_Axis1_Axis1.8@45.883,19.158 U?_Axis1_Axis1.8@63.18,186.425 U?_Axis1_Axis1.8@91.75,45.3 U?_Axis1_Axis1.9@59.558,16.306 U?_Axis1_Axis1.9@60.508,16.306 U?_Axis1_Axis1.9@61.458,16.306 U?_Axis1_Axis1.9@63.18,186.925 U?_Axis1_Axis1.9@72.258,16.306 U?_Axis1_Axis1.9@73.208,16.306 U?_Axis1_Axis1.9@74.158,16.306 U?_Axis1_Axis1.9@84.958,16.306 U?_Axis1_Axis1.9@85.908,16.306 U?_Axis1_Axis1.9@86.858,16.306 U?_Axis1_Axis1.9@92.25,45.3 U?_Axis1_Axis1.10 U?_Axis1_Axis1.11 U?_Axis1_Axis1.12 U?_Axis1_Axis1.13@94.25,45.3 U?_Axis1_Axis1.14 U?_Axis1_Axis1.15@63.18,189.925 U?_Axis1_Axis1.16 U?_Axis1_Axis1.17 U?_Axis1_Axis1.18@32.154,57.164 U?_Axis1_Axis1.18@34.754,57.164 U?_Axis1_Axis1.18@76.35,36.336 U?_Axis1_Axis1.18@78.95,36.336 U?_Axis1_Axis1.18@83.384,81.148 U?_Axis1_Axis1.18@85.984,81.148 U?_Axis1_Axis1.18@97.7,47.75 U?_Axis1_Axis1.19@32.154,58.464 U?_Axis1_Axis1.19@34.754,58.464 U?_Axis1_Axis1.19@76.35,37.636 U?_Axis1_Axis1.19@78.95,37.636 U?_Axis1_Axis1.19@83.384,82.448 U?_Axis1_Axis1.19@85.984,82.448 U?_Axis1_Axis1.19@97.7,48.25 U?_Axis1_Axis1.20@97.7,48.75 U?_Axis1_Axis1.21@97.7,49.25 U?_Axis1_Axis1.22 U?_Axis1_Axis1.23 U?_Axis1_Axis1.24 U?_Axis1_Axis1.25 U?_Axis1_Axis1.26 U?_Axis1_Axis1.27@56.23,192.375 U?_Axis1_Axis1.28@55.73,192.375 U?_Axis1_Axis1.29@55.23,192.375 U?_Axis1_Axis1.30 U?_Axis1_Axis1.31@54.23,192.375 U?_Axis1_Axis1.32@53.73,192.375 U?_Axis1_Axis1.33 U?_Axis1_Axis1.34 U?_Axis1_Axis1.35 U?_Axis1_Axis1.36 U?_Axis1_Axis1.37 U?_Axis1_Axis1.38 U?_Axis1_Axis1.39 U?_Axis1_Axis1.40 U?_Axis1_Axis1.41 U?_Axis1_Axis1.42 U?_Axis1_Axis1.43 U?_Axis1_Axis1.44 U?_Axis1_Axis1.45 U?_Axis1_Axis1.46 U?_Axis1_Axis1.47@51.78,183.425 U?_Axis1_Axis1.48@51.78,182.925 U?_Axis1_Axis1.49@86.3,54.75 U?_Axis1_Axis1.50@86.3,54.25 U?_Axis1_Axis1.51 U?_Axis1_Axis1.52 U?_Axis1_Axis1.53 U?_Axis1_Axis1.54 U?_Axis1_Axis1.55 U?_Axis1_Axis1.56 U?_Axis1_Axis1.57 U?_Axis1_Axis1.58 U?_Axis1_Axis1.59 U?_Axis1_Axis1.60 U?_Axis1_Axis1.61 U?_Axis1_Axis1.62 U?_Axis1_Axis1.63@60.73,180.975 U?_Axis1_Axis1.64@61.23,180.975

## Polygon pours and split planes (outlines as drawn)
no net on L2_GND (split plane): 99.49,99 99.49,0.51 0.51,0.51 0.51,99.49 99.49,99.49
no net on L3_PWR (split plane): 99.49,99 99.49,0.51 0.51,0.51 0.51,99.49 99.49,99.49

## Text inside footprints (layer, text, board x,y; h text height)
C7_Axis1: Top Overlay "+" at 154.35,162.2 h2
C8_Axis1: Top Overlay "+" at 90.35,162.2 h2
C18_Axis1: Top Overlay "+" at 361.681,137.2 h2
C31_Axis1: Top Overlay "+" at 266.681,64.2 h2
C32_Axis1: Top Overlay "+" at 238.681,64.2 h2
C38_Axis1: Top Overlay "+" at 328.356,9.2 h2
C47_Axis1: Top Overlay "+" at 283.675,88.2 h2
C48_Axis1: Top Overlay "+" at 255.675,88.2 h2
C54_Axis1: Top Overlay "+" at 172.675,88.15 h2
C_BULK1_Axis1: Top Overlay "+" at 237.275,180.2 h2 r90
C_BULK2_Axis1: Top Overlay "+" at 257.275,180.2 h2 r90
C_BULK3_Axis1: Top Overlay "+" at 277.275,180.2 h2 r90
U?_Axis1_Axis1: Top Overlay "1" at 31.564,56.279 h0.4; Top Overlay "8" at 31.609,58.894 h0.4; Mechanical 2 "ADD VIAS" at 35.664,56.324 h0.4 r90
U?_Axis1_Axis1: Top Overlay "1" at 84.188,14.786 h0.4 r90
U?_Axis1_Axis1: Top Overlay "1" at 71.488,14.786 h0.4 r90
U?_Axis1_Axis1: Top Overlay "1" at 58.788,14.786 h0.4 r90
U?_Axis1_Axis1: Top Overlay "1" at 46.088,14.913 h0.4 r90
U?_Axis1_Axis1: Top Overlay "1" at 75.76,35.451 h0.4; Top Overlay "8" at 75.805,38.066 h0.4; Mechanical 2 "ADD VIAS" at 79.86,35.496 h0.4 r90
U?_Axis1_Axis1: Top Overlay "1" at 63.594,35.254 h0.4
U?_Axis1_Axis1: Top Overlay "1" at 33.512,35.085 h0.4 r90
U?_Axis1_Axis1: Top Overlay "1" at 82.794,80.263 h0.4; Top Overlay "8" at 82.839,82.878 h0.4; Mechanical 2 "ADD VIAS" at 86.894,80.308 h0.4 r90
U?_Axis1_Axis1: Top Overlay "1" at 17.64,29.54 h1
U?_Axis1_Axis1: Top Overlay "1" at 6.28,8.48 h0.4 r90
U?_Axis1_Axis1: Top Overlay "1" at 67.246,88.645 h0.4 r90
U?_Axis1_Axis1: Top Overlay "1" at 72.28,76.48 h0.4 r90
U?_Axis1_Axis1: Top Overlay "1" at 58.28,77.48 h0.4 r90
U?_Axis1_Axis1: Top Overlay "1" at 47.28,77.48 h0.4 r90
U?_Axis1_Axis1: Top Overlay "1" at 35.28,75.48 h0.4 r90